# Altium PCB SWS_LEFT.PcbDoc (part 2 of 2)
Units mm, origin at the board's own origin, x right, y up, seen from the top; angles counter-clockwise.
Board outline 46.01 x 38 mm, 4 copper layers (Top Layer, Layer 1, Layer 2, Bottom Layer), stack 0.603 mm thick; 110 components, 82 nets, 355 pads, 130 vias.
Unrouted connection lines stored in the file: 5.
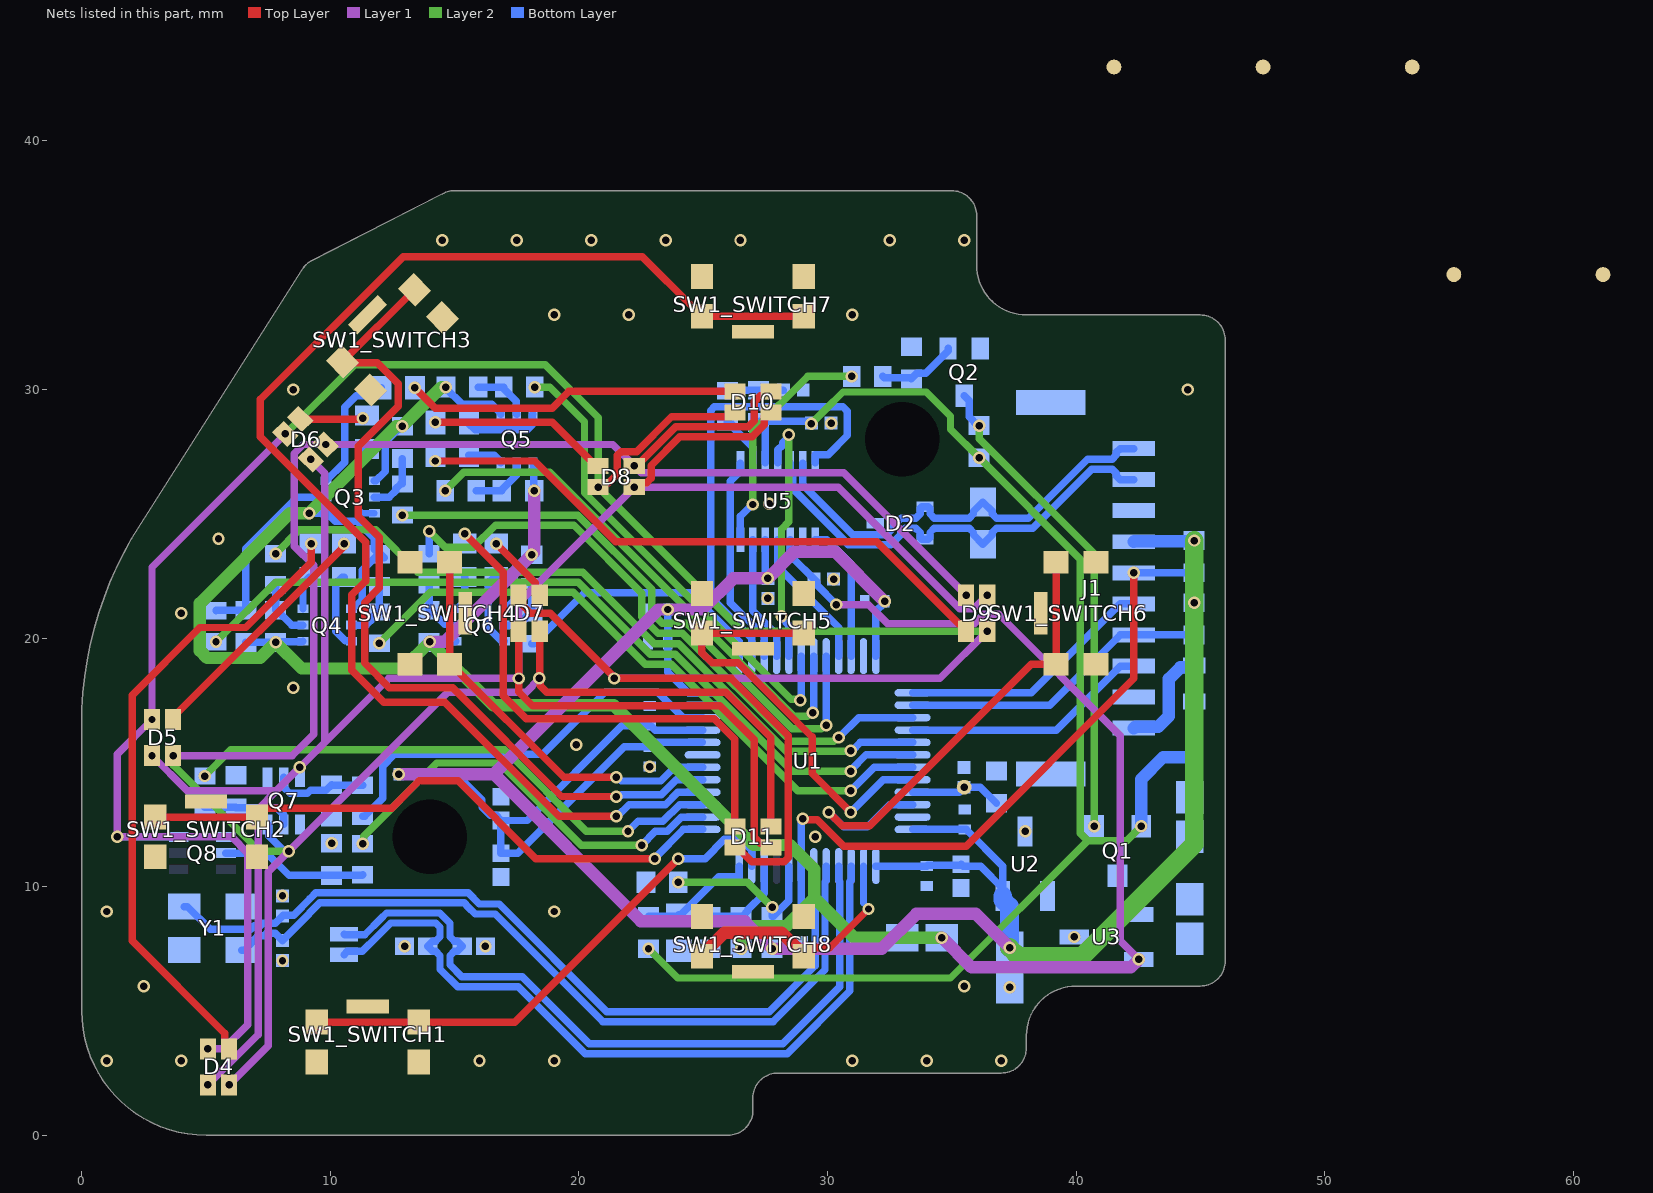
[diagram p4: the nets of this part, all layers, seen from the top]

## Via types
v1: diameter 0.5, hole 0.3, Top Layer to Bottom Layer, 130 vias

## Nets (pads, with @x,y where several pads share a name; then routed paths per layer and width w, separated by ;. In a path a pad name is that pad's centre, name@x,y a point inside that pad or via, vN(x,y) a via of type N, cw(c..) or ccw(c..) an arc to the next point about the centre after c; other vN are vias at no path point)
3V3: C2.1 C3.2 C4.2 C5.2 C8.1 C9.2 C21.1 C29.2 FB1.1 J1.4 R4.1 R6.1 R7.2 TP3.1 U1.1 U1.24 U1.36 U1.48 U2.2 U5.5 | length 94.4
  Layer 1 w0.5: v1(12.75,14.525) 16.575,14.525 ; v1(32.3,21.475) 30.3,23.475 28.675,23.475 v1(27.6,22.4) 26.213,22.4 24.963,21.15 v1(23.575,21.15) 23.2,21.15 16.575,14.525 ; v1(37.325,7.55) 35.972,8.903 33.578,8.903 32.175,7.5 v1(27.775,7.5) 26.667,8.608 22.492,8.608 16.575,14.525
  Layer 2 w0.75: v1(37.325,7.55) 37.675,7.2 40.246,7.2 44.75,11.704 v1(44.75,21.425) v1(44.75,23.925)
  Bottom Layer w0.3: v1(23.575,21.15) C3.2@23.575,19.8 23.575,18.625 24.4,17.8 U1.24@24.975,17.8 ; U5.5@27.5,23.957 27.5,22.5 v1(27.6,22.4) ; U1.1@31.95,10.825 C9.2@34,10.825 34.039,10.864 35.336,10.864 C8.1@35.375,10.904 35.465,10.814 36.161,10.814 U2.2@37.05,9.925 ; U1.36@31.95,19.275 31.95,21.075 32.3,21.425 v1(32.3,21.475) ; U1.48@33.425,12.3 C5.2@35.525,12.3 35.575,12.3 37.05,10.825 U2.2@37.05,9.925 ; U2.2@37.05,9.625 U2.2@37.05,9.925
  Bottom Layer w0.5: J1.4@42.325,23.875 42.35,23.9 44.725,23.9 v1(44.75,23.925)
  Bottom Layer w0.75: U2.2@37.05,9.625 37.05,9.475 37.325,9.2 v1(37.325,7.55)
5V: C23.1 C28.2 Q3.1 Q3.4 Q4.1 Q4.4 Q5.1 Q5.4 Q6.1 Q6.4 R11.2 R22.1 R23.1 R28.1 R29.1 R34.1 R35.1 R39.1 R48.1 U3.2 U5.3 | length 119
  Layer 1 w0.3: v1(30.35,21.35) 31.647,21.35 32.422,20.575 35.9,20.575 36.275,20.95 36.9,20.95 41.775,16.075 41.775,7.825 v1(42.525,7.075)
  Layer 1 w0.5: v1(14,19.85) 14.6,19.85 v1(18.1,23.35) 18.2,23.45 v1(18.2,25.925) ; v1(34.601,7.95) 35.801,6.75 42.2,6.75 v1(42.525,7.075)
  Layer 2 w0.5: v1(14.65,30.1) 14.475,30.1 v1(12.9,28.525) 12.65,28.525 v1(9.15,25.025) 8.375,25.025 4.75,21.4 4.75,19.493 5.043,19.2 7.175,19.2 v1(7.8,19.825) 8.85,18.775 12.925,18.775 v1(14,19.85) 16.55,17.3 21.4,17.3 27.025,11.675 28.5,11.675 29.475,10.7 29.475,9.55 ; v1(26.525,7.5) 26.525,8.107 26.818,8.4 28.325,8.4 29.475,9.55 ; v1(34.601,7.95) 31.075,7.95 29.475,9.55
  Bottom Layer w0.3: R28.1@6.6,19.825 v1(7.8,19.825) 7.825,19.85 8.875,19.85 Q4.4@8.9,19.875 ; v1(9.15,25.025) Q3.4@9.825,25.025 9.85,25 9.9,25 10.2,24.7 11.075,24.7 11.769,24.006 11.769,23.581 R22.1@11.975,23.375 ; Q4.1@10.85,21.175 10.9,21.175 11.277,21.552 11.277,22.727 11.925,23.375 R22.1@11.975,23.375 ; Q3.1@11.775,26.325 11.825,26.325 12.202,26.702 12.202,27.877 12.85,28.525 v1(12.9,28.525) ; R22.1@12.161,23.236 12.022,23.375 R22.1@11.975,23.375 ; R48.1@13.975,19.825 v1(14,19.85) 15.025,19.85 Q6.4@15.05,19.875 ; v1(14.65,30.1) 14.65,30.05 15.298,29.402 16.498,29.402 16.85,29.05 Q5.1@16.85,29 ; Q6.1@17,21.175 17.05,21.175 17.402,21.527 17.402,22.702 18.05,23.35 v1(18.1,23.35) ; Q5.4@18.15,27.05 18.175,27.025 18.175,25.95 v1(18.2,25.925) ; U5.3@28.5,23.957 28.503,23.955 28.503,23.322 29.56,22.265 29.56,22.14 v1(30.35,21.35)
B_ENABLE: R42.1 U1.14 | length 17
  Layer 2 w0.3: v1(11.3,11.725) 11.338,11.763 11.338,12.025 14.288,14.975 16.8,14.975 20.101,11.674 v1(22.525,11.674)
  Bottom Layer w0.3: v1(22.525,11.674) 23.075,12.223 23.548,12.223 24.125,12.8 U1.14@24.975,12.8
B_GND: D4.3 D5.3 D6.3 D7.3 D8.3 D9.3 D10.3 D11.3 Q8.6 | length 115.1
  Top Layer w0.3: D7.3@17.575,21.725 17.75,21.55 17.75,21.294 18.044,21 18.849,21 21.45,18.399 21.45,18.375 26.125,18.375 28.425,16.075 28.425,11.169 28.254,10.998 26.952,10.998 26.375,11.575 D11.3@26.275,11.575 ; v1(20.775,26.075) 20.95,26.25 21.206,26.25 21.548,26.593 21.548,27.354 21.696,27.502 22.327,27.502 23.725,28.9 26.1,28.9 D10.3@26.275,29.075
  Layer 1 w0.3: v1(5.075,3.475) 5.7,3.475 6.675,4.45 6.675,11.35 6.025,12 v1(1.425,12) 1.425,15.325 v1(2.825,16.725) 2.825,22.85 v1(8.187,28.212) ; v1(21.425,18.375) 34.525,18.375 v1(36.425,20.275)
  Layer 2 w0.3: v1(8.187,28.212) 10.975,31 18.65,31 20.775,28.875 v1(20.775,26.075) 26.575,20.275 v1(36.425,20.275)
  Bottom Layer w0.3: v1(1.425,12) Q8.6@3.9,12
BOOT: C12.1 R2.2 TP1.1 U1.45 | length 3.7
  Bottom Layer w0.3: U1.45@33.425,13.8 35.3,13.8 v1(35.5,14) 36.15,14 R2.2@36.8,13.35
CAN1_RX: U1.33 U5.4 | length 5.7
  Bottom Layer w0.3: U5.4@28,23.957 28.002,23.955 28.002,22.873 30.45,20.426 U1.33@30.45,19.275
CAN1_TX: U1.34 U5.1 | length 5.6
  Bottom Layer w0.3: U5.1@29.5,23.957 29.968,23.957 30.95,22.975 U1.34@30.95,19.275
CAN_INH: R12.2 U5.7 | length 9.5
  Layer 2 w0.3: v1(27,25.375) 27,28.325 29.2,30.525 v1(30.975,30.525)
  Bottom Layer w0.3: U5.7@26.5,23.957 26.5,24.896 26.979,25.375 v1(27,25.375)
CAN_MISO: U1.28 U5.6 | length 5.1
  Bottom Layer w0.3: U5.6@27,23.957 27,21.1 27.95,20.15 U1.28@27.95,19.275
CAN_MOSI: U1.29 U5.11 | length 10.5
  Layer 2 w0.3: v1(28.15,20.875) 28.15,24.375 28.45,24.675 v1(28.45,28.175)
  Bottom Layer w0.3: U5.11@28,27.043 28.002,27.045 28.002,27.573 28.196,27.766 28.196,27.867 28.45,28.121 v1(28.45,28.175) ; v1(28.15,20.875) 28.15,20.821 28.45,20.521 U1.29@28.45,19.275
CAN_N: D2.2 J1.2 R17.2 U5.12 | length 18.5
  Bottom Layer w0.3: U5.12@28.5,27.043 28.503,27.041 28.503,26.544 28.599,26.447 28.599,26.007 30.609,23.997 30.844,23.762 32.546,23.762 32.949,24.166 32.949,24.248 33.125,24.424 33.549,24.424 33.725,24.248 33.725,24.035 33.785,23.975 D2.2@33.925,23.975 34.065,23.975 34.125,24.035 34.125,24.248 34.301,24.424 35.699,24.424 35.875,24.248 35.875,24.15 R17.2@36.25,23.775 36.625,24.15 36.625,24.248 36.801,24.424 38.253,24.424 40.628,26.799 41.449,26.799 41.625,26.623 41.625,26.525 41.775,26.375 J1.2@42.325,26.375
CAN_nCS: U1.26 U5.14 | length 19.1
  Bottom Layer w0.3: U1.26@26.95,19.275 26.95,20 25.298,21.652 25.298,29.154 25.446,29.302 30.624,29.302 30.8,29.126 30.8,28.15 30.032,27.382 29.503,27.382 29.5,27.38 U5.14@29.5,27.043
CAN_P: D2.1 J1.1 R17.1 U5.13 | length 17.8
  Bottom Layer w0.3: U5.13@29,27.043 29,26.173 31.01,24.163 32.379,24.163 32.548,24.332 32.548,24.415 32.959,24.826 33.549,24.826 33.725,25.002 33.725,25.215 33.785,25.275 D2.1@33.925,25.275 34.065,25.275 34.125,25.215 34.125,25.002 34.301,24.826 35.699,24.826 35.875,25.002 35.875,25.1 R17.1@36.25,25.475 36.625,25.1 36.625,25.002 36.801,24.826 38.087,24.826 40.462,27.201 41.449,27.201 41.625,27.377 41.625,27.475 41.775,27.625 J1.1@42.325,27.625
CAN_SCLK: U1.27 U5.8 | length 8.5
  Bottom Layer w0.3: U5.8@26.5,27.043 26.5,26.706 26.096,26.303 26.096,21.429 27.45,20.075 U1.27@27.45,19.275
EN_MOSFET: Q1.1 Q2.3 R9.1 | length 19.5
  Layer 2 w0.3: v1(36.1,28.55) 36.1,28.028 40.725,23.403 v1(40.725,12.435)
  Bottom Layer w0.3: Q2.3@35.5,29.75 35.7,29.55 35.7,28.9 36.05,28.55 v1(36.1,28.55)
G_ENABLE: R45.1 U1.15 | length 22.3
  Layer 2 w0.3: v1(4.95,14.45) 6,15.5 17.025,15.5 20.301,12.224 v1(21.975,12.224)
  Bottom Layer w0.3: v1(21.975,12.224) 22.376,12.625 23.375,12.625 24.05,13.3 U1.15@24.975,13.3
G_GND: D4.2 D5.2 D6.2 D7.2 D8.2 D9.2 D10.2 D11.2 Q7.3 | length 92.6
  Top Layer w0.3: D7.2@17.575,20.275 v1(17.575,18.375) 17.575,17.832 18.132,17.275 25.675,17.275 27.048,15.902 27.048,11.996 27.294,11.75 27.55,11.75 D11.2@27.725,11.575 ; v1(22.225,26.075) 22.325,26.075 22.5,26.25 22.726,26.25 22.902,26.426 22.902,26.941 24.058,28.097 25.579,28.097 26.971,28.097 27.45,28.576 27.45,28.9 27.625,29.075 D10.2@27.725,29.075
  Layer 1 w0.3: v1(2.825,15.275) 4.25,13.85 7.825,13.85 ; v1(5.075,2.025) 7.1,4.05 7.1,13.125 7.825,13.85 ; v1(9.212,27.187) 9.775,26.624 9.775,15.8 ; v1(36.425,21.725) 35.875,21.175 35.325,21.175 30.425,26.075 v1(22.225,26.075) 17.575,21.425 v1(17.575,18.375) 12.35,18.375 9.775,15.8 ; 7.825,13.85 9.775,15.8
  other v1: 8.775,14.8
GND: C1.2 C2.2 C3.1 C4.1 C5.1 C6.2 C7.1 C8.2 C9.1 C10.2 C11.1 C12.2 C14.2 C15.2 C16.2 C17.2 C20.2 C21.2 C22.2 C23.2 C28.1 C29.1 C30.1 C32.1 D2.3 J1.3 J1.9 J1.11 J1.12 Q2.2 Q7.1 Q7.4 Q8.1 R2.1 R3.1 R8.1 R13.1 R14.2 R43.1 R44.1 R46.1 SW1_SWITCH1.3 SW1_SWITCH1.4 SW1_SWITCH1.5 SW1_SWITCH2.3 SW1_SWITCH2.4 SW1_SWITCH2.5 SW1_SWITCH3.3 SW1_SWITCH3.4 SW1_SWITCH3.5 SW1_SWITCH4.3 SW1_SWITCH4.4 SW1_SWITCH4.5 SW1_SWITCH5.3 SW1_SWITCH5.4 SW1_SWITCH5.5 SW1_SWITCH6.3 SW1_SWITCH6.4 SW1_SWITCH6.5 SW1_SWITCH7.3 SW1_SWITCH7.4 SW1_SWITCH7.5 SW1_SWITCH8.3 SW1_SWITCH8.4 SW1_SWITCH8.5 TP4.1 TP6.1 U1.19 U1.23 U1.35 U1.47 U2.3 U3.3 U5.2 Y1.2 Y1.4
  other v1: 1,3 4,3 16,3 19,3 31,3 34,3 37,3 37.325,5.949 2.5,6 35.5,6 8.075,7.025 12.984,7.606 16.241,7.606 39.925,7.975 1,9 19,9 8.075,9.625 10.05,11.75 29.5,12 37.95,12.225 22.85,14.825 19.9,15.7 8.5,18 4,21 27.6,21.6 30.25,22.375 5.5,24 27.65,25.4 30.15,28.65 8.5,30 44.5,30 19,33 22,33 31,33 14.5,36 17.5,36 20.5,36 23.5,36 26.5,36 32.5,36 35.5,36
INT_3V3_SENSE: R7.1 R8.2 U1.8 | length 6.9
  Layer 2 w0.3: v1(24,10.175) 26.775,10.175 v1(27.775,9.175)
  Bottom Layer w0.3: v1(27.775,9.175) R7.1@27.775,8.8 27.825,8.8 28.45,9.425 U1.8@28.45,10.825
INT_5V_SENSE: R11.1 R14.1 U1.10 | length 3.7
  Bottom Layer w0.3: R14.1@25.275,8.8 R11.1@26.525,8.8 26.575,8.8 26.8,9.025 26.8,9.075 27.45,9.725 U1.10@27.45,10.825
LED0_nENABLE: R20.1 U1.43 | length 26
  Layer 2 w0.3: v1(11.975,19.8) 14.022,21.847 19.778,21.847 22.677,18.948 23.709,18.948 28.807,13.85 v1(30.936,13.85)
  Bottom Layer w0.3: v1@30.95,13.85 30.95,13.872 31.878,14.8 U1.43@33.425,14.8
LED1_nENABLE: R26.1 U1.42 | length 32.5
  Layer 2 w0.3: v1(5.4,19.85) 7.798,22.248 19.977,22.248 22.875,19.35 23.875,19.35 28.575,14.65 v1(30.936,14.65)
  Bottom Layer w0.3: v1@30.95,14.65 30.95,14.7 31.55,15.3 U1.42@33.425,15.3
LED2_nENABLE: R32.1 U1.30 | length 19.4
  Layer 2 w0.3: v1(18.225,30.1) 18.825,30.1 20.225,28.7 20.225,25.847 28.534,17.538 28.862,17.538 v1(28.9,17.5)
  Bottom Layer w0.3: v1(28.9,17.5) 28.9,17.554 28.95,17.604 U1.30@28.95,19.275
LED3_nENABLE: R38.1 U1.31 | length 21.3
  Layer 2 w0.3: v1(14.625,25.925) 15.375,26.675 18.829,26.675 28.654,16.85 29.196,16.85 29.346,17 v1(29.4,17)
  Bottom Layer w0.3: v1@29.45,17.222 U1.31@29.45,19.275
LED4_nENABLE: R21.1 U1.32 | length 24
  Layer 2 w0.3: v1(12.9,24.95) 19.95,24.95 22.925,21.975 22.925,21.022 23.347,20.6 24.329,20.6 28.579,16.35 29.746,16.35 29.896,16.5 v1(29.95,16.5)
  Bottom Layer w0.3: v1(29.95,16.5) U1.32@29.95,19.275
LED5_nENABLE: R27.1 U1.41 | length 29.9
  Layer 2 w0.3: v1(7.8,23.4) 8.75,24.35 11.825,24.35 13.525,22.65 20.15,22.65 23.025,19.775 24.018,19.775 28.345,15.448 30.921,15.448 v1(30.936,15.464)
  Bottom Layer w0.3: v1(30.936,15.464) 30.99,15.464 31.326,15.8 U1.41@33.425,15.8
LED6_nENABLE: R33.1 U1.25 | length 10.6
  Bottom Layer w0.3: R33.1@18.1,19.775 18.175,19.775 20.225,21.825 24.45,21.825 24.7,21.575 24.725,21.575 26.45,19.85 U1.25@26.45,19.275
LED7_nENABLE: R47.1 U1.39 | length 25.5
  Layer 2 w0.3: v1(13.975,24.3) 14.625,23.65 15.747,23.65 16.646,24.548 19.784,24.548 22.523,21.809 22.523,20.856 23.181,20.198 24.162,20.198 28.511,15.85 30.246,15.85 30.396,16 v1(30.45,16)
  Bottom Layer w0.3: R47.1@13.975,23.4 v1(13.975,24.3) ; v1(30.45,16) 31.25,16.8 U1.39@33.425,16.8
NetC20_1: C20.1 C22.1 Q1.3 U2.1 U3.1
NetC32_2: C32.2 R15.2 R16.2 TP5.1 | length 2.3
  Bottom Layer w0.3: R16.2@25.975,29.95 25.987,29.962 27.212,29.962 R15.2@27.225,29.975 C32.2@28.225,29.975
NetD1_2: D1.2 F1.2 | length 1.3
  Bottom Layer w0.5: D1.2@44.75,16.125 F1.2@44.75,17.45
NetD4_4: D4.4 R24.2 | length 26
  Top Layer w0.3: D4.4@5.925,3.475 5.757,3.643 5.757,4.093 2.025,7.825 2.025,17.7 4.75,20.425 6.6,20.425 9.225,23.05 v1(9.225,23.8)
NetD5_4: D5.4 R31.2 | length 9.9
  Top Layer w0.3: D5.4@3.675,16.725 3.675,16.825 10.512,23.662 10.512,23.762 v1(10.55,23.8)
NetD6_4: D6.4 R30.2 | length 2.6
  Top Layer w0.3: D6.4@8.788,28.813 8.859,28.742 9.106,28.742 9.177,28.813 11.263,28.813 v1(11.3,28.85)
NetD7_4: D7.4 R49.2 | length 2.8
  Top Layer w0.3: v1(16.675,23.8) 18.25,22.225 18.25,21.9 D7.4@18.425,21.725
NetD8_4: D8.4 R40.2 | length 7.3
  Top Layer w0.3: v1(14.225,28.675) 18.925,28.675 20.675,26.925 D8.4@20.775,26.925
NetD9_4: D9.4 R36.2 | length 24.2
  Top Layer w0.3: v1(14.225,27.125) 18.225,27.125 21.475,23.875 31.975,23.875 35.3,20.55 35.4,20.55 35.575,20.375 D9.4@35.575,20.275
NetD10_4: D10.4 R25.2 | length 13.5
  Top Layer w0.3: v1(13.4,30.075) 14.225,29.25 18.925,29.25 19.6,29.925 D10.4@26.275,29.925
NetD11_4: D11.4 R37.2 | length 20.7
  Top Layer w0.3: v1(15.4,24.2) 16.95,22.65 16.95,17.675 17.875,16.75 25.45,16.75 26.275,15.925 D11.4@26.275,12.425
NetQ2_1: Q2.1 R12.1 R13.2 | length 3.2
  Bottom Layer w0.3: R12.1@32.225,30.525 32.275,30.475 33.325,30.475 R13.2@33.375,30.425 33.6,30.65 33.95,30.65 34.854,31.554 Q2.1@34.854,31.654
NetQ3_2: Q3.2 R21.2 R23.2 | length 2.4
  Bottom Layer w0.3: Q3.2@11.775,25.675 12.375,25.675 12.625,25.925 12.625,26 12.825,26.2 R21.2@12.9,26.2 R23.2@12.9,27.225
NetQ3_3: Q3.3 R30.1 | length 3.3
  Bottom Layer w0.254: R30.1@11.475,27.6 11.4,27.6 11.127,27.327 11.127,27.18 11.125,27.178 11.125,25.174 11.274,25.025 Q3.3@11.775,25.025
NetQ3_5: Q3.5 R26.2 R28.2 | length 7.8
  Bottom Layer w0.3: R26.2@5.4,21.1 5.412,21.113 6.588,21.113 R28.2@6.6,21.125 6.6,23.6 8.675,25.675 Q3.5@9.825,25.675
NetQ3_6: Q3.6 R25.1 | length 5.1
  Bottom Layer w0.3: Q3.6@9.825,26.325 10.575,27.075 10.575,29.281 11.044,29.75 11.8,29.75 12.05,30 R25.1@12.05,30.075
NetQ4_2: Q4.2 R20.2 R22.2 | length 2.4
  Bottom Layer w0.3: Q4.2@10.85,20.525 11.45,20.525 11.7,20.775 11.7,20.85 11.9,21.05 R20.2@11.975,21.05 R22.2@11.975,22.075
NetQ4_3: Q4.3 R31.1 | length 3.1
  Bottom Layer w0.3: R31.1@10.55,22.45 10.475,22.45 10.225,22.2 10.225,20.276 10.601,19.9 10.825,19.9 Q4.3@10.85,19.875
NetQ4_5: Q4.5 R27.2 R29.2 | length 2.4
  Bottom Layer w0.3: R27.2@7.8,22.15 R29.2@7.8,21.125 7.85,21.125 8.45,20.525 Q4.5@8.9,20.525
NetQ4_6: Q4.6 R24.1 | length 1.5
  Bottom Layer w0.3: Q4.6@8.9,21.175 8.9,22.2 9.15,22.45 R24.1@9.225,22.45
NetQ5_2: Q5.2 R32.2 R34.2 | length 2.3
  Bottom Layer w0.3: R34.2@15.95,30.1 R32.2@16.975,30.1 16.975,30.025 17.475,29.525 17.475,29.025 Q5.2@17.5,29
NetQ5_3: Q5.3 R40.1 | length 3.2
  Bottom Layer w0.3: R40.1@15.575,28.675 15.575,28.625 15.825,28.375 17.924,28.375 18.125,28.576 18.125,28.975 Q5.3@18.15,29
NetQ5_5: Q5.5 R38.2 R39.2 | length 2.4
  Bottom Layer w0.3: R38.2@15.875,25.925 R39.2@16.9,25.925 16.9,25.975 17.5,26.575 Q5.5@17.5,27.05
NetQ5_6: Q5.6 R36.1 | length 1.4
  Bottom Layer w0.3: R36.1@15.575,27.35 16.6,27.35 16.85,27.1 Q5.6@16.85,27.05
NetQ6_2: Q6.2 R33.2 R35.2 | length 2.4
  Bottom Layer w0.3: Q6.2@17,20.525 17.6,20.525 17.825,20.75 17.825,20.825 18.025,21.025 R33.2@18.1,21.025 R35.2@18.1,22.05
NetQ6_3: Q6.3 R49.1 | length 3.1
  Bottom Layer w0.3: R49.1@16.675,22.45 16.6,22.45 16.35,22.2 16.35,20.419 16.869,19.9 16.975,19.9 Q6.3@17,19.875
NetQ6_5: Q6.5 R47.2 R48.2 | length 2.3
  Bottom Layer w0.3: R47.2@13.975,22.15 R48.2@13.975,21.125 14.025,21.125 14.6,20.55 15.025,20.55 Q6.5@15.05,20.525
NetQ6_6: Q6.6 R37.1 | length 1.4
  Bottom Layer w0.3: Q6.6@15.05,21.175 15.1,21.175 15.4,21.475 R37.1@15.4,22.45
NetQ7_2: Q7.2 R41.2 R43.2 | length 3.8
  Bottom Layer w0.3: Q7.2@8.125,14.4 8.125,14 8.377,13.748 9.079,13.748 9.206,13.875 9.825,13.875 R43.2@10.05,14.1 10.062,14.088 11.288,14.088 R41.2@11.3,14.075
NetQ7_5: Q7.5 R45.2 R46.2 | length 3.7
  Bottom Layer w0.3: R45.2@4.95,13.2 4.963,13.188 6.188,13.188 R46.2@6.2,13.175 7.85,13.175 8.125,12.9 Q7.5@8.125,12.5
NetQ8_2: Q8.2 R42.2 R44.2 | length 5.9
  Bottom Layer w0.3: Q8.2@5.8,11.35 7.438,11.35 8.337,10.45 R44.2@10.05,10.45 10.062,10.463 11.288,10.463 R42.2@11.3,10.475
NetR16_1: R16.1 U5.9 | length 2.1
  Bottom Layer w0.3: R16.1@25.975,28.7 26.05,28.7 26.25,28.5 26.25,28.425 26.997,27.678 26.997,27.045 U5.9@27,27.043
NRESET: C1.1 J1.5 R6.2 TP2.1 U1.7 | length 27.5
  Top Layer w0.3: v1(29,12.725) 29.038,12.687 29.585,12.687 29.722,12.55 29.728,12.55 30.652,11.625 35.575,11.625 42.325,18.375 v1(42.325,22.625)
  Bottom Layer w0.3: C1.1@28.85,8.55 28.95,8.65 U1.7@28.95,10.825 28.95,11.772 ; 28.95,11.772 28.95,12.621 29,12.671 v1(29,12.725) ; v1(42.325,22.625) R6.2@44.75,22.625
PWR_IN: F1.1 J1.10 | length 4.3
  Bottom Layer w0.5: J1.10@42.325,16.375 42.375,16.425 43.3,16.425 43.737,16.862 43.737,18.363 44.2,18.825 44.675,18.825 F1.1@44.75,18.9
R_ENABLE: R41.1 U1.22 | length 16.9
  Bottom Layer w0.3: R41.1@11.3,12.825 11.375,12.825 12.1,13.55 12.1,14.85 12.575,15.325 18.55,15.325 21.05,17.825 23.175,17.825 24.2,16.8 U1.22@24.975,16.8
R_GND: D4.1 D5.1 D6.1 D7.1 D8.1 D9.1 D10.1 D11.1 Q7.6 | length 101.8
  Top Layer w0.3: v1(18.411,18.389) v1@18.425,18.375 ; D7.1@18.425,20.275 v1@18.425,18.375 ; v1(22.225,26.925) 22.325,26.925 22.5,27.1 22.5,27.107 23.891,28.498 25.746,28.498 26.804,28.498 27.048,28.743 27.048,29.504 27.294,29.75 27.55,29.75 D10.1@27.725,29.925 ; D11.1@27.725,12.425 27.725,16 25.9,17.825 18.7,17.825 18.449,18.076 18.449,18.351 v1@18.425,18.375
  Layer 1 w0.3: v1(3.675,15.275) 8.475,15.275 9.325,16.125 9.325,22.922 8.55,23.697 8.55,27.425 8.913,27.788 v1(9.813,27.788) 21.362,27.788 v1(22.225,26.925) ; v1(5.925,2.025) 7.502,3.602 7.502,10.602 v1(8.325,11.425) 14.725,17.825 17.875,17.825 18.411,18.361 v1(18.411,18.389) ; v1(22.225,26.925) 22.501,26.65 30.65,26.65 v1(35.575,21.725)
  Layer 2 w0.3: v1(3.675,15.275) 3.682,15.268 3.682,14.893 7.15,11.425 v1(8.325,11.425)
  Bottom Layer w0.3: Q7.6@7.475,12.5 7.525,12.45 7.525,12.05 7.727,11.848 8.112,11.463 8.287,11.463 v1(8.325,11.425)
SW_1: SW1_SWITCH1.1 SW1_SWITCH1.2 U1.11 | length 21.4
  Top Layer w0.3: SW1_SWITCH1.1@9.45,4.55 17.425,4.55 23.999,11.124 v1(24.001,11.124)
  Bottom Layer w0.3: v1(24.001,11.124) 24.003,11.125 25.075,11.125 25.85,11.9 26.518,11.9 26.95,11.468 U1.11@26.95,10.825
SW_2: SW1_SWITCH2.1 SW1_SWITCH2.2 U1.13 | length 24.4
  Top Layer w0.3: SW1_SWITCH2.1@2.95,12.8 SW1_SWITCH2.2@7.05,12.8 7.05,12.85 7.35,13.15 12.463,13.15 13.567,14.254 15.141,14.254 18.271,11.124 v1(23.05,11.124)
  Bottom Layer w0.3: v1@23.063,11.162 24.201,12.3 U1.13@24.975,12.3
SW_3: SW1_SWITCH3.1 SW1_SWITCH3.2 U1.17 | length 35.3
  Top Layer w0.3: SW1_SWITCH3.2@13.384,34.015 SW1_SWITCH3.1@10.485,31.116 10.52,31.081 11.88,31.081 12.725,30.236 12.725,29.325 11.125,27.725 11.125,24.9 11.975,24.05 11.975,22.021 11.375,21.421 11.375,19 12.375,18 14.925,18 19.298,13.627 21.486,13.627 v1(21.5,13.613)
  Bottom Layer w0.3: v1(21.5,13.613) 21.538,13.651 21.68,13.651 21.731,13.702 23.316,13.702 23.914,14.3 U1.17@24.975,14.3
SW_4: SW1_SWITCH4.1 SW1_SWITCH4.2 U1.18 | length 16.5
  Top Layer w0.3: SW1_SWITCH4.1@14.8,23.05 SW1_SWITCH4.2@14.8,18.95 14.85,18.95 19.4,14.4 v1(21.5,14.4) v1@21.527,14.4
  Bottom Layer w0.3: v1(21.5,14.4) 21.554,14.4 21.704,14.25 23.296,14.25 23.846,14.8 U1.18@24.975,14.8
SW_5: SW1_SWITCH5.1 SW1_SWITCH5.2 U1.44 | length 17.5
  Top Layer w0.3: SW1_SWITCH5.1@29.05,20.15 SW1_SWITCH5.1@29.05,20.2 SW1_SWITCH5.2@24.95,20.2 24.95,19.411 25.361,19 26.4,19 29.378,16.022 29.378,14.558 v1(30.936,13)
  Bottom Layer w0.3: v1(30.936,13) 32.236,14.3 U1.44@33.425,14.3
SW_6: SW1_SWITCH6.1 SW1_SWITCH6.2 U1.46 | length 20.2
  Top Layer w0.3: v1(30.05,13) 30.6,12.45 31.7,12.45 38.2,18.95 SW1_SWITCH6.1@39.2,18.95 SW1_SWITCH6.2@39.2,23.05
  Bottom Layer w0.3: v1(30.05,13) 30.65,12.4 31.6,12.4 32.5,13.3 U1.46@33.425,13.3
SW_7: SW1_SWITCH7.1 SW1_SWITCH7.2 U1.16 | length 55.1
  Top Layer w0.3: v1(21.5,12.825) 19.2,12.825 14.6,17.425 12.15,17.425 10.864,18.711 10.864,21.737 11.422,22.296 11.422,23.853 7.175,28.1 7.175,29.6 12.925,35.35 22.55,35.35 24.6,33.3 24.65,33.3 24.95,33 SW1_SWITCH7.2@24.95,32.95 SW1_SWITCH7.1@29.05,32.95
  Bottom Layer w0.3: v1(21.5,12.825) 21.54,12.825 22.015,13.3 23.482,13.3 23.982,13.8 U1.16@24.975,13.8
SW_8: SW1_SWITCH8.1 SW1_SWITCH8.2 U1.2 | length 9.8
  Top Layer w0.3: SW1_SWITCH8.1@29.05,7.25 29.35,7.55 30.1,7.55 v1(31.65,9.1)
  Top Layer w0.5: SW1_SWITCH8.2@24.95,7.2 24.95,7.25 25.85,8.15 28.15,8.15 29.05,7.25 SW1_SWITCH8.1@29.05,7.2
  Bottom Layer w0.3: 31.45,9.354 U1.2@31.45,10.825
SWCLK: J1.7 R4.2 U1.38 | length 12.5
  Bottom Layer w0.3: U1.38@33.425,17.3 38.95,17.3 41.775,20.125 J1.7@42.325,20.125 R4.2@44.75,20.125
SWDIO: J1.6 U1.37 | length 10.4
  Bottom Layer w0.3: U1.37@33.425,17.8 38.2,17.8 41.775,21.375 J1.6@42.325,21.375
SWO: J1.8 U1.40 | length 10
  Bottom Layer w0.3: U1.40@33.425,16.3 39.2,16.3 41.775,18.875 J1.8@42.325,18.875
V_BATT: C30.2 D1.1 Q1.2 R1.2 R9.2 R15.1 U5.10 | length 57
  Layer 2 w0.3: v1(22.8,7.5) 23.975,6.325 34.95,6.325 40.475,11.85 ; v1(29.35,28.625) 29.35,28.628 29.922,29.2 29.925,29.2 30.625,29.9 33.975,29.9 34.95,28.925 34.95,28.4 v1(36.1,27.25) 40.175,23.175 40.175,12.15 40.475,11.85 ; v1(42.625,12.435) 42.04,11.85 40.475,11.85
  Bottom Layer w0.3: R15.1@27.225,28.675 27.275,28.725 29.25,28.725 v1(29.35,28.625) ; R15.1@27.3,28.65 27.5,28.45 U5.10@27.5,27.043
  Bottom Layer w0.5: v1(42.625,12.435) 42.625,14.325 43.51,15.21 D1.1@44.75,15.21
VCC_SENSE: R1.1 R3.2 U1.12 | length 4.7
  Bottom Layer w0.3: R1.1@22.8,8.8 23.95,8.8 R3.2@24.025,8.875 24.1,8.875 25.625,10.4 26.45,10.4 U1.12@26.45,10.825
VDDA: C6.1 C7.2 C10.1 C11.2 FB1.2 U1.20 U1.21 | length 25.3
  Bottom Layer w0.3: FB1.2@13.55,14.525 15.075,14.525 16.1,13.5 16.1,13.197 16.429,12.868 16.678,12.868 16.864,12.682 C6.1@16.864,12.66 ; C11.2@22.85,15.625 21.825,15.625 17.542,11.342 C10.1@16.864,11.342 C6.1@16.864,12.66 ; C11.2@22.9,15.625 23.079,15.804 U1.20@24.971,15.804 ; U1.21@24.975,16.3 23.075,16.3 22.9,16.475 C7.2@22.85,16.475 21.729,16.475 17.914,12.66 C6.1@16.864,12.66
X32_N: C15.1 U1.4 Y2.2 | length 29.9
  Bottom Layer w0.3: Y2.2@10.55,8.088 10.576,8.062 11.382,8.062 11.394,8.074 12.024,8.704 12.259,8.939 14.402,8.939 14.813,8.528 14.813,7.988 14.989,7.812 15.103,7.812 C15.1@15.309,7.606 15.103,7.4 14.989,7.4 14.813,7.224 14.813,6.85 15.288,6.375 17.718,6.375 17.953,6.14 20.418,3.675 28.207,3.675 30.499,5.967 30.499,10.201 30.45,10.25 U1.4@30.45,10.825
X32_P: C14.1 U1.3 Y2.1 | length 30.7
  Bottom Layer w0.3: Y2.1@10.55,7.263 10.687,7.4 11.286,7.4 11.546,7.66 11.548,7.66 11.561,7.673 12.426,8.538 14.236,8.538 14.412,8.362 14.412,7.988 14.236,7.812 14.122,7.812 C14.1@13.916,7.606 14.122,7.4 14.236,7.4 14.412,7.224 14.412,6.684 15.122,5.973 17.552,5.973 20.252,3.273 28.373,3.273 30.901,5.801 30.901,10.201 30.95,10.25 U1.3@30.95,10.825
X_N: C17.1 U1.6 Y1.1 | length 33.1
  Bottom Layer w0.3: Y1.1@4.125,9.2 4.25,9.2 5.17,8.28 6.791,8.28 6.934,8.423 7.179,8.423 7.282,8.526 7.789,8.526 7.965,8.702 7.965,8.715 8.1,8.85 8.519,8.85 8.562,8.894 9.18,9.511 9.415,9.746 15.547,9.746 15.991,9.302 16.798,9.302 21.125,4.975 27.65,4.975 29.499,6.824 29.499,10.201 29.45,10.25 U1.6@29.45,10.825
X_P: C16.1 U1.5 Y1.3 | length 31.6
  Bottom Layer w0.3: Y1.3@6.425,7.45 6.55,7.45 6.925,7.825 6.925,7.846 7.101,8.022 7.346,8.022 7.448,8.124 7.789,8.124 7.965,7.948 7.965,7.935 C16.1@8.075,7.825 8.185,7.935 8.185,7.948 8.685,8.448 8.729,8.492 9.581,9.345 15.38,9.345 15.549,9.176 15.825,8.9 16.632,8.9 20.959,4.573 27.816,4.573 29.901,6.658 29.901,10.201 29.95,10.25 U1.5@29.95,10.825
pads on no net: Q8.3 Q8.4 Q8.5 U1.9

## Polygon pours and split planes (outlines as drawn)
GND on Bottom Layer "GND_L04_P004" (solid, remove dead copper, pour order 4): 5,0 26,0 ccw(c26,1) 27,1 27,1.5 cw(c28,1.5) 28,2.5 37,2.5 ccw(c37,3.5) 38,3.5 38,4 cw(c40,4) 40,6 45,6 ccw(c45,7) 46,7 46,32 ccw(c45,32) 45,33 38,33 cw(c38,35) 36,35 36,37 ccw(c35,37) 35,38 15,38 ccw(c15,37) 14.5,37.866 9.207,35.159 ccw(c9.707,34.293) 8.841,34.793 2,24 ccw(c14.99,16.5) -0.01,16.5 0,16.5 0,5 ccw(c5,5)
NetC20_1 on Bottom Layer "NETC20_1_L04_P000" (solid, pour order 0): 38.55,10.225 38.55,9.025 39.15,9.025 41.925,8.575 43.125,8.575 44.022,8.848 45.128,8.848 45.128,12.653 44.022,12.653 42.075,10.885 41.275,10.885 39.15,10.225
GND on Layer 1 "GND_L02_P002" (solid, remove dead copper, pour order 2): 5,0 26,0 ccw(c26,1) 27,1 27,1.5 cw(c28,1.5) 28,2.5 37,2.5 ccw(c37,3.5) 38,3.5 38,4 cw(c40,4) 40,6 45,6 ccw(c45,7) 46,7 46,32 ccw(c45,32) 45,33 38,33 cw(c38,35) 36,35 36,37 ccw(c35,37) 35,38 15,38 ccw(c15,37) 14.5,37.866 9.207,35.159 ccw(c9.707,34.293) 8.841,34.793 2,24 ccw(c14.99,16.5) -0.01,16.5 0,16.5 0,5 ccw(c5,5)
GND on Layer 2 "GND_L03_P003" (solid, remove dead copper, pour order 3): 5,0 26,0 ccw(c26,1) 27,1 27,1.5 cw(c28,1.5) 28,2.5 37,2.5 ccw(c37,3.5) 38,3.5 38,4 cw(c40,4) 40,6 45,6 ccw(c45,7) 46,7 46,32 ccw(c45,32) 45,33 38,33 cw(c38,35) 36,35 36,37 ccw(c35,37) 35,38 15,38 ccw(c15,37) 14.5,37.866 9.207,35.159 ccw(c9.707,34.293) 8.841,34.793 2,24 ccw(c14.99,16.5) -0.01,16.5 0,16.5 0,5 ccw(c5,5)
GND on Top Layer "GND_L01_P001" (solid, remove dead copper, pour order 1): 5,0 26,0 ccw(c26,1) 27,1 27,1.5 cw(c28,1.5) 28,2.5 37,2.5 ccw(c37,3.5) 38,3.5 38,4 cw(c40,4) 40,6 45,6 ccw(c45,7) 46,7 46,32 ccw(c45,32) 45,33 38,33 cw(c38,35) 36,35 36,37 ccw(c35,37) 35,38 15,38 ccw(c15,37) 14.5,37.866 9.207,35.159 ccw(c9.707,34.293) 8.841,34.793 2,24 ccw(c14.99,16.5) -0.01,16.5 0,16.5 0,5 ccw(c5,5)

## Silkscreen, mask and mechanical layers (free items; w line width, h text height)
Mechanical 1:
  lines w0.254: -0.01,16.5 cw(c14.99,16.5) 2,24 8.841,34.793 cw(c9.707,34.293) 9.207,35.159 14.5,37.866 cw(c15,37) 15,38 35,38 cw(c35,37) 36,37 36,35 ccw(c38,35) 38,33 45,33 cw(c45,32) 46,32 46,7 cw(c45,7) 45,6 40,6 ccw(c40,4) 38,4 38,3.5 cw(c37,3.5) 37,2.5 28,2.5 ccw(c28,1.5) 27,1.5 27,1 cw(c26,1) 26,0 5,0 cw(c5,5) 0,5 0,16.5 ; 3,15 3,6.5 19,6.5 19,15 ; 3,15.025 18.975,15.025 ; 3,19 19,19 19,31 11,31 3,19 ; 22,6.5 37,6.5 37,32.5 22,32.5 22,6.5

## Text inside footprints (layer, text, board x,y; h text height)
U5: Bottom Overlay "*" at 29.678,23.385 h1.27 r270; Bottom 3D Body "*" at 28.8,24.509 h1.27 r270